# EAGLE board led_remote (EAGLE 6.1)
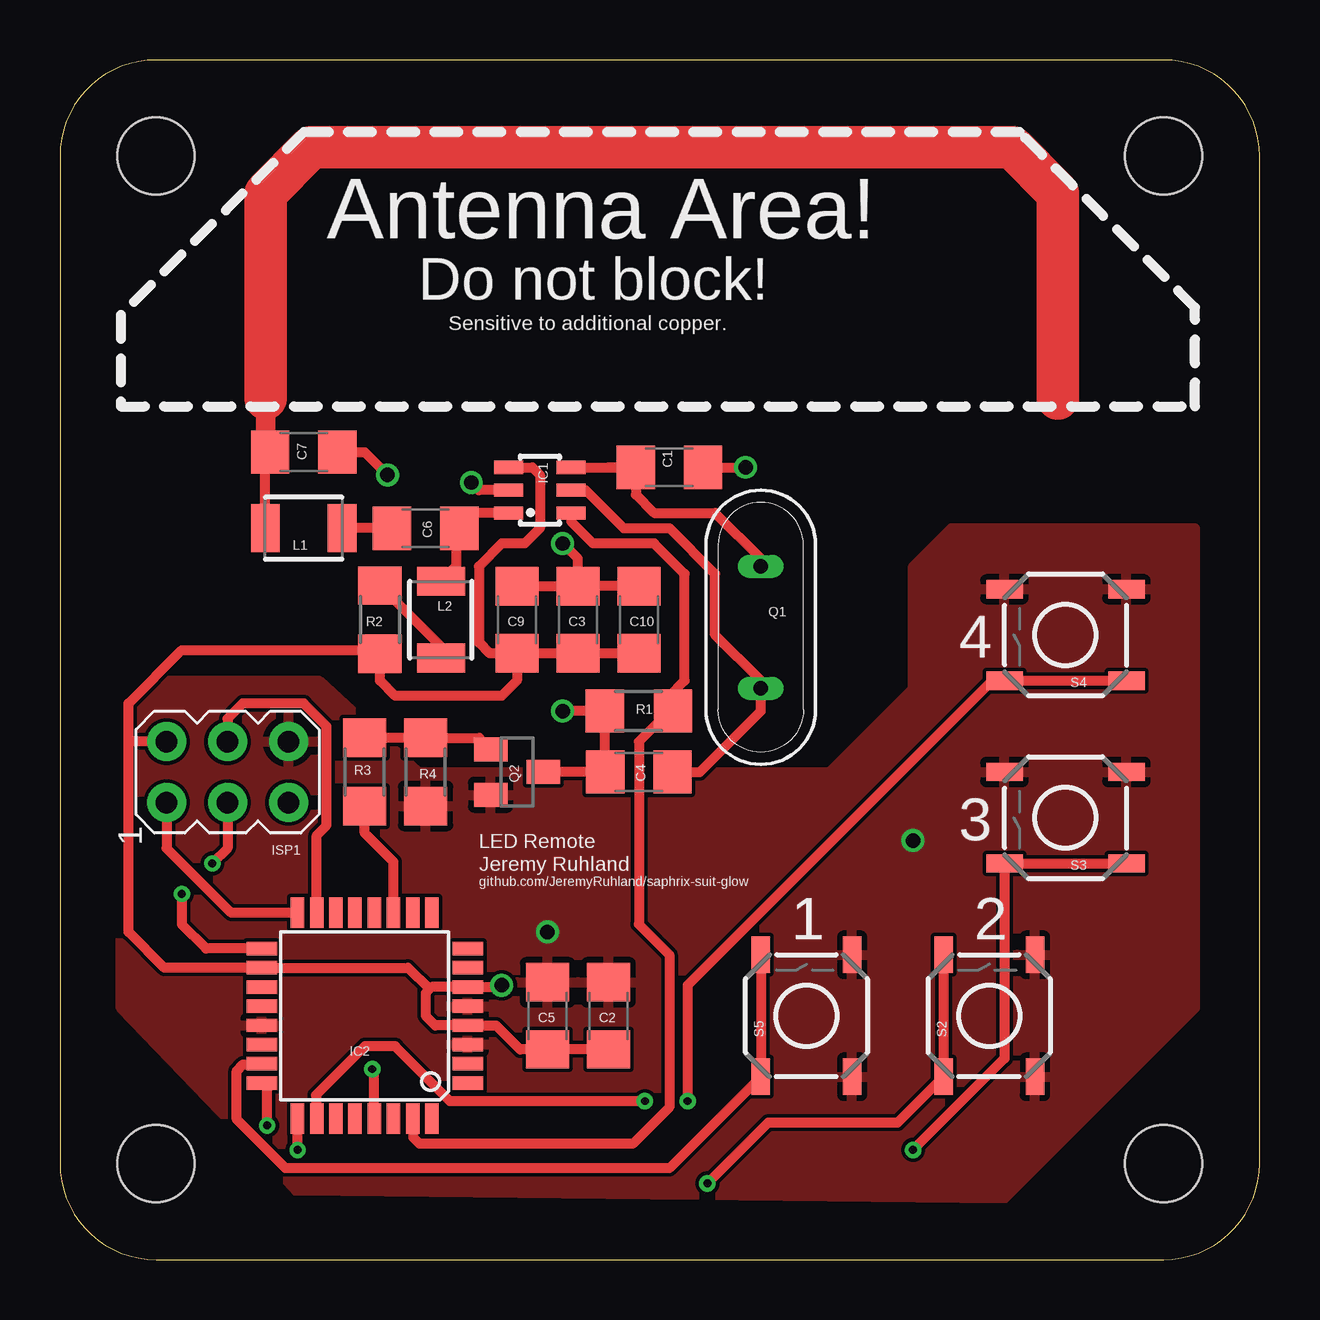
[diagram p0: board, top side]
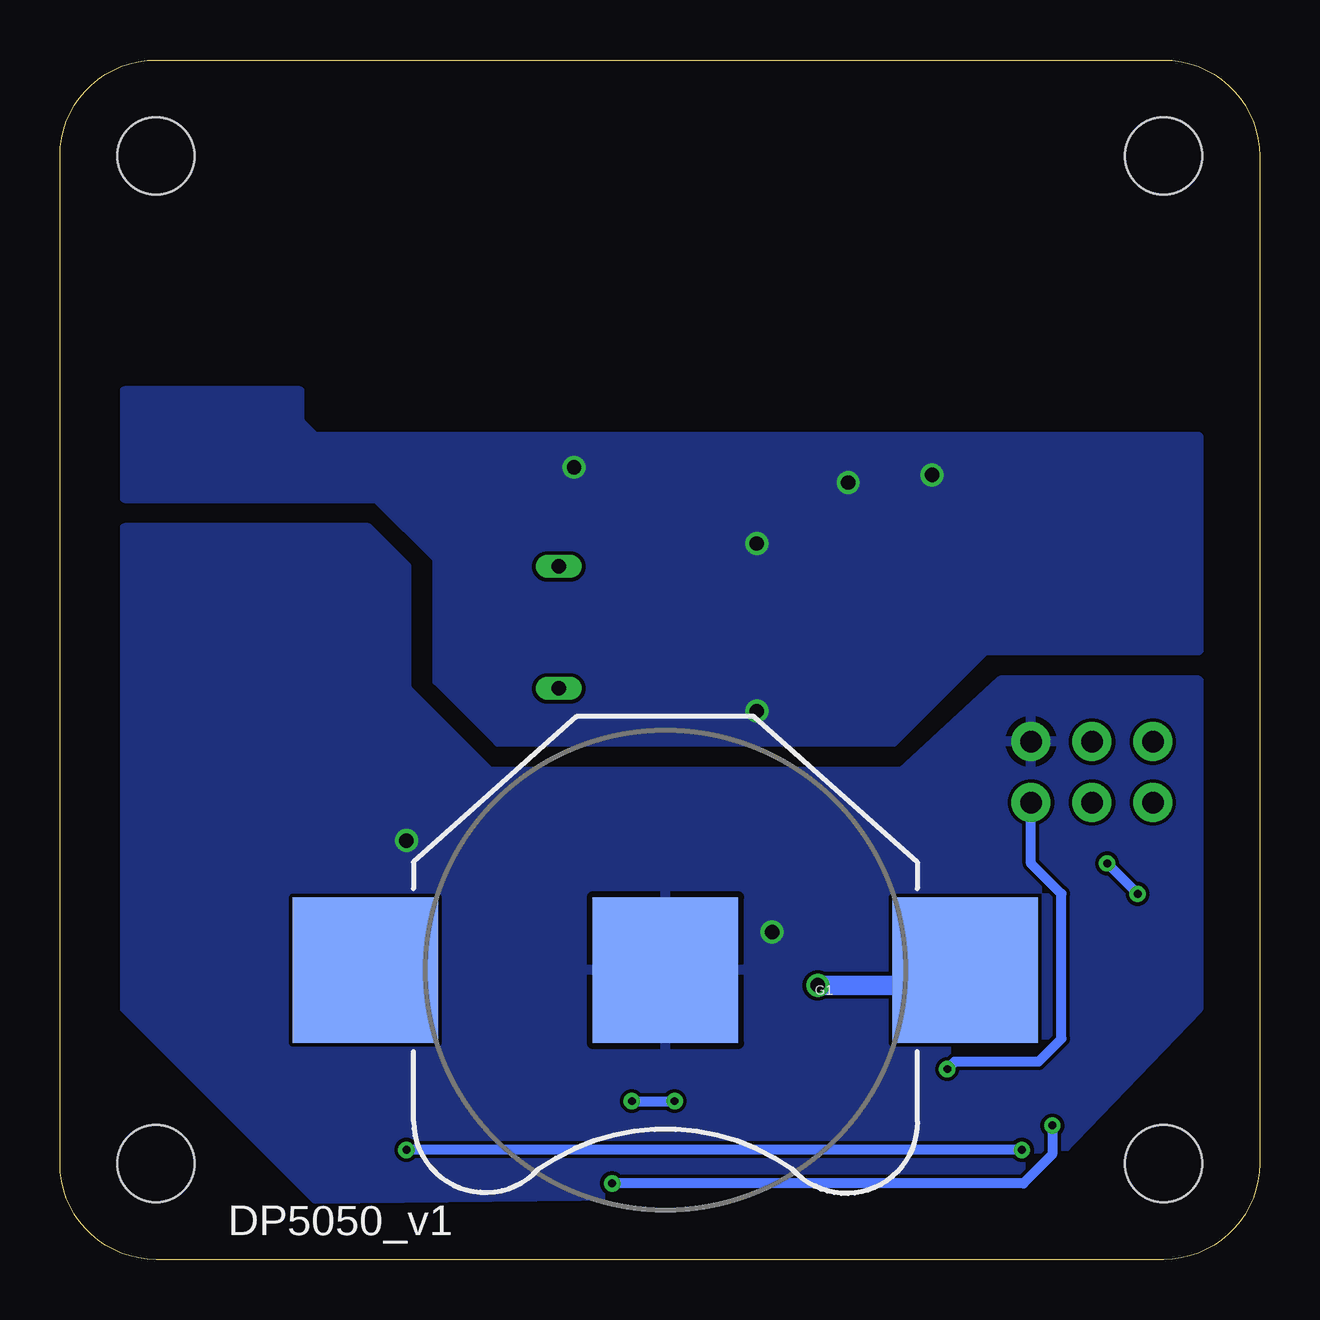
[diagram p1: board, bottom side, seen from below]

Size 50 x 50 mm. Coordinates in mm from the lower left corner, seen from the top.
Copper layers (1*16): Top 0.0356mm / dielectric 1.5011mm / Bottom 0.0356mm
Design rules: minimum track width 6mil, minimum drill 13mil, track to track 6mil, track to pad 6mil, pad to pad 6mil, via to via 6mil, smd to smd 6mil, copper to edge 15mil, drill to drill 6mil, minimum pad ring 7mil, minimum via ring 7mil, stop-mask expansion 4mil, vias tented up to drill 0mil, thermal gap 10mil

## Footprints (pad centres in the part's own frame; a part is rotated, then mirrored left to right if it is on the bottom)
C1206 = smd 1.6 x 1.8: 1 -1.4,0; 2 1.4,0
BATTCON_20MM = smd 6.07 x 6.07: 1 -12.5,0; 2 0,0; 3 12.5,0
SOT23-6 = smd 0.55 x 1.2: 1 0.95,-1.3; 2 0,-1.3; 3 -0.95,-1.3; 4 -0.95,1.3; 5 0,1.3; 6 0.95,1.3
TQFP32-08 = smd 1.27 x 0.559: 1 -4.293,2.8; 2 -4.293,2; 3 -4.293,1.2; 4 -4.293,0.4; 5 -4.293,-0.4; 6 -4.293,-1.2; 7 -4.293,-2; 8 -4.293,-2.8; 17 4.293,-2.8; 18 4.293,-2; 19 4.293,-1.2; 20 4.293,-0.4; 21 4.293,0.4; 22 4.293,1.2; 23 4.293,2; 24 4.293,2.8 | smd 0.559 x 1.27: 9 -2.8,-4.293; 10 -2,-4.293; 11 -1.2,-4.293; 12 -0.4,-4.293; 13 0.4,-4.293; 14 1.2,-4.293; 15 2,-4.293; 16 2.8,-4.293; 25 2.8,4.293; 26 2,4.293; 27 1.2,4.293; 28 0.4,4.293; 29 -0.4,4.293; 30 -1.2,4.293; 31 -2,4.293; 32 -2.8,4.293
AVRISP = drill 0.9 pad 1.626: 1 -1.27,2.54; 2 1.27,2.54; 3 -1.27,0; 4 1.27,0; 5 -1.27,-2.54; 6 1.27,-2.54
1210 = smd 1.2 x 2: 1 -1.6,0; 2 1.6,0
DP5050_V1 = hole 3.2: 4,4; 46,4; 46,46; 4,46
QS = drill 0.61 long: 1 -2.54,0; 2 2.54,0
SOT23 = smd 1 x 1.4: 1 -0.95,-1.1; 2 0.95,-1.1; 3 0,1.1
R1206 = smd 1.6 x 1.803: 1 -1.422,0; 2 1.422,0
TACTILE_SWITCH_SMD = smd 1.524 x 0.762: 1 -2.54,1.905; 2 2.54,1.905; 3 -2.54,-1.905; 4 2.54,-1.905

## Placement (x,y rotation side)
C1  18pf  [C1206]  25.4,33.02 0 top
C2  10uf  [C1206]  22.86,10.16 90 top
C3  0.1uf  [C1206]  21.59,26.67 90 top
C4  18pf  [C1206]  24.13,20.32 180 top
C5  0.1uf  [C1206]  20.32,10.16 90 top
C6  12pf  [C1206]  15.24,30.48 180 top
C7  4.7pf  [C1206]  10.16,33.66 0 top
C9  10uf  [C1206]  19.05,26.67 90 top
C10  100pf  [C1206]  24.13,26.67 90 top
G1  [BATTCON_20MM]  24.77,12.06 180 bottom
IC1  MICRF113  [SOT23-6]  20,32.07 270 top
IC2  MEGA8-AI  [TQFP32-08]  12.7,10.16 180 top
ISP1  AVRISP-6  [AVRISP]  6.99,20.32 90 top
L1  [1210]  10.16,30.48 180 top
L2  470nh  [1210]  15.88,26.67 90 top
PCB2  PCB_DP_SQUARE-5X5  [DP5050_V1]  0,0 0 top
Q1  13.56mhz  [QS]  29.21,26.35 270 top
Q2  [SOT23]  19.05,20.32 270 top
R1  100k  [R1206]  24.13,22.86 0 top
R2  [R1206]  13.34,26.67 270 top
R3  100  [R1206]  12.7,20.32 270 top
R4  100k  [R1206]  15.24,20.32 90 top
S2  [TACTILE_SWITCH_SMD]  38.73,10.16 90 top
S3  [TACTILE_SWITCH_SMD]  41.91,18.41 180 top
S4  [TACTILE_SWITCH_SMD]  41.91,26.04 180 top
S5  [TACTILE_SWITCH_SMD]  31.11,10.16 90 top

## Library data of the parts
C1-C7 C9 C10 ISP1 Q2 R1-R4 = adafruit
G1 L1 L2 S2-S5 = sparkfun
IC1 = micrel
IC2 = atmel; MPN: ATMEGA8-16AU; OC_FARNELL: 9171371; OC_NEWARK: 73M8863
PCB2 = dp_devices
Q1 = special

## Nets
AGND: C1.2 C3.2 C4.2 C7.2 C9.2 C10.2 IC1.2 Q2.3 R1.1
ANT: C7.1 L1.2
GND: C2.2 C5.2 G1.2 IC2.3 IC2.5 IC2.21 ISP1.6 Q2.2 R4.1 S2.3 S2.4 S3.3 S3.4 S4.3 S4.4 S5.3 S5.4
MISO: IC2.16 ISP1.1
MOSI: IC2.15 ISP1.4
N$1: L2.1 R2.1
N$2: Q2.1 R3.1 R4.2
N$5: C1.1 IC1.4 Q1.1
N$6: C4.1 IC1.5 Q1.2
N$8: IC2.26 S4.1 S4.2
N$9: C6.1 IC1.1 L2.2
N$11: C6.2 L1.1
N$12: IC2.23 S5.1 S5.2
N$13: IC2.24 S2.1 S2.2
N$14: IC2.25 S3.1 S3.2
RST: IC2.29 ISP1.5
SCK: IC2.17 ISP1.3
TX: IC1.6 IC2.31 R1.2
TXPWR: IC2.11 R3.2
VCC: C2.1 C3.1 C5.1 C9.1 C10.1 G1.1 IC1.3 IC2.4 IC2.6 IC2.18 ISP1.2 R2.2

## Tracks (layer width: path | path; a pad name or v marks a point on that pad's centre or on a via)
AGND  (via drill 0.6)
  Top 0.406: Q2.3 C4.2 22.71,20.34 R1.1 v20.95,22.86 | C9.2 C3.2 C10.2 | C9.2 19.05,27.94 | IC1.2 17.46,32.07 v17.14,32.38 | C9.2 21.4,28.07 21.59,28.26 21.59,29.21 v20.95,29.84 | C1.2 v28.57,33.02 | C7.2 12.7,33.66 v13.65,32.7
  pour Bottom: 2.54,34.29 39.37,34.29 40.01,34.92 40.01,36.2 47.31,36.2 47.31,31.75 36.83,31.75 34.29,29.21 34.29,24.13 31.75,21.59 15.24,21.59 11.43,25.4 2.54,25.4
ANT
  Top 0.406: L1.2 8.56,33.45 C7.1 8.57,33.66
  Top 0.813: 8.57,33.66 8.57,35.88
  Top 1.778: 41.59,35.88 41.59,44.45 39.69,46.35 10.48,46.35 8.57,44.45 8.57,35.88
GND  (via drill 0.6)
  Top 0.406: 15.71,19.37 R4.1 | 20.57,11.43 C5.2
  other vias: 20.32,13.65 35.56,17.46
  pour Top: 35.56,28.89 37.15,30.48 47.31,30.48 47.31,10.48 39.37,2.54 9.84,2.86 2.54,10.48 2.54,24.13 10.79,24.13 14.92,20.32 32.07,20.32 35.56,23.81
  pour Bottom: 35.56,28.89 37.15,30.48 47.31,30.48 47.31,10.48 39.37,2.54 9.84,2.86 2.54,10.48 2.54,24.13 10.79,24.13 14.92,20.32 32.07,20.32 35.56,23.81
MISO
  Top 0.406: IC2.16 7.14,14.45 4.45,17.14 ISP1.1
MOSI
  Top 0.406: IC2.15 10.7,17.68 11.11,18.1 11.11,22.23 10.16,23.18 7.62,23.18 6.99,22.54 ISP1.4
N$1
  Top 0.406: L2.1 15.88,25.55 R2.1
N$2
  Top 0.406: R3.1 R4.2 17.48,21.74 Q2.1
N$5
  Top 0.406: IC1.4 22.86,33.02 | 22.86,33.02 24.13,33.02 | 22.86,33.02 C1.1 24,31.88 24.77,31.11 27.3,31.11 29.21,29.21 Q1.1
N$6
  Top 0.406: IC1.5 21.91,32.07 23.5,30.48 25.4,30.48 27.3,28.57 27.3,26.04 29.21,24.13 Q1.2 29.21,22.86 26.67,20.32 C4.1
N$8  (via drill 0.33)
  Top 0.406: S4.1 S4.2 38.86,24.13 26.16,11.43 v26.16,6.6 | v24.38,6.6 16.26,6.6 13.97,8.89 12.7,8.89 10.67,6.86 10.67,6.1 IC2.26
  Bottom 0.406: v26.16,6.6 v24.38,6.6
N$9
  Top 0.406: C6.1 16.96,30.8 | C6.1 16.51,30.35 16.51,28.91 L2.2 | IC1.1 17.28,31.12 C6.1
N$11
  Top 0.406: C6.2 L1.1
N$12
  Top 0.406: S5.2 S5.1 25.4,3.81 9.4,3.81 7.37,5.84 7.37,7.87 7.62,8.13 8.38,8.13 IC2.23
N$13  (via drill 0.33)
  Top 0.406: S2.2 S2.1 34.92,5.71 29.53,5.71 v26.99,3.17 | v8.64,5.59 8.64,7.11 IC2.24
  Bottom 0.406: v8.64,5.59 8.64,4.38 9.84,3.17 v26.99,3.17
N$14  (via drill 0.33)
  Top 0.406: S3.1 S3.2 39.37,8.38 v35.56,4.57 | v9.91,4.57 9.91,5.84 IC2.25
  Bottom 0.406: v9.91,4.57 v35.56,4.57
RST  (via drill 0.33)
  Top 0.406: IC2.29 13.1,7.86 v13.02,7.94
  Bottom 0.406: v13.02,7.94 12.7,8.26 9.21,8.26 8.26,9.21 8.26,15.24 9.53,16.51 ISP1.5
SCK  (via drill 0.33)
  Top 0.406: ISP1.3 6.99,17.14 v6.35,16.51 | v5.08,15.24 5.08,13.97 6.09,12.96 IC2.17
  Bottom 0.406: v6.35,16.51 v5.08,15.24
TX
  Top 0.406: 25.4,22.86 25.4,23.5 26.04,24.13 26.04,28.57 24.77,29.84 22.23,29.84 21.3,30.77 IC1.6 | 25.4,22.86 24.13,21.59 24.13,13.97 25.4,12.7 25.4,6.35 23.88,4.83 14.99,4.83 14.73,5.08 14.73,5.84 IC2.31 | 25.4,22.86 R1.2
TXPWR
  Top 0.406: IC2.11 13.9,16.58 12.7,17.78 R3.2
VCC  (via drill 0.6)
  Top 0.406: R2.2 13.34,24.77 | C9.1 C3.1 C10.1 | C9.1 19.05,24.13 18.41,23.5 13.97,23.5 13.34,24.13 13.34,24.77 | C9.1 17.91,25.27 17.46,25.72 17.46,28.89 18.41,29.84 19.37,29.84 20,30.48 20,32.7 19.69,33.02 IC1.3 | 15.4,11.27 15.49,11.36 IC2.6 18.34,11.36 v18.41,11.43 | 15.4,11.27 15.24,11.11 15.24,10.16 15.64,9.76 IC2.4 18.18,9.76 19.18,8.76 C5.1 C2.1 | 15.4,11.27 14.51,12.16 IC2.18 4.35,12.16 2.86,13.65 2.86,21.59 | 2.86,21.59 2.86,23.18 5.08,25.4 12.7,25.4 13.34,24.77 | ISP1.2 2.86,21.59
  Bottom 0.813: G1.1 12.27,11.87 12.7,11.43 v18.41,11.43

## Text on the board
_tsilk: Antenna Area! | Do not block! | Sensitive to additional copper. | 4 | LED Remote | 3 | Jeremy Ruhland | github.com/JeremyRuhland/saphrix-suit-glow | 1 | 2